# Altium PCB FinalPCB.PcbDoc
Units mil, origin at the board's own origin, x right, y up, seen from the top; angles counter-clockwise.
Board outline 3575 x 2485 mil, 2 copper layers (Top Layer, Bottom Layer); 63 components, 34 nets, 258 pads, 2 vias.
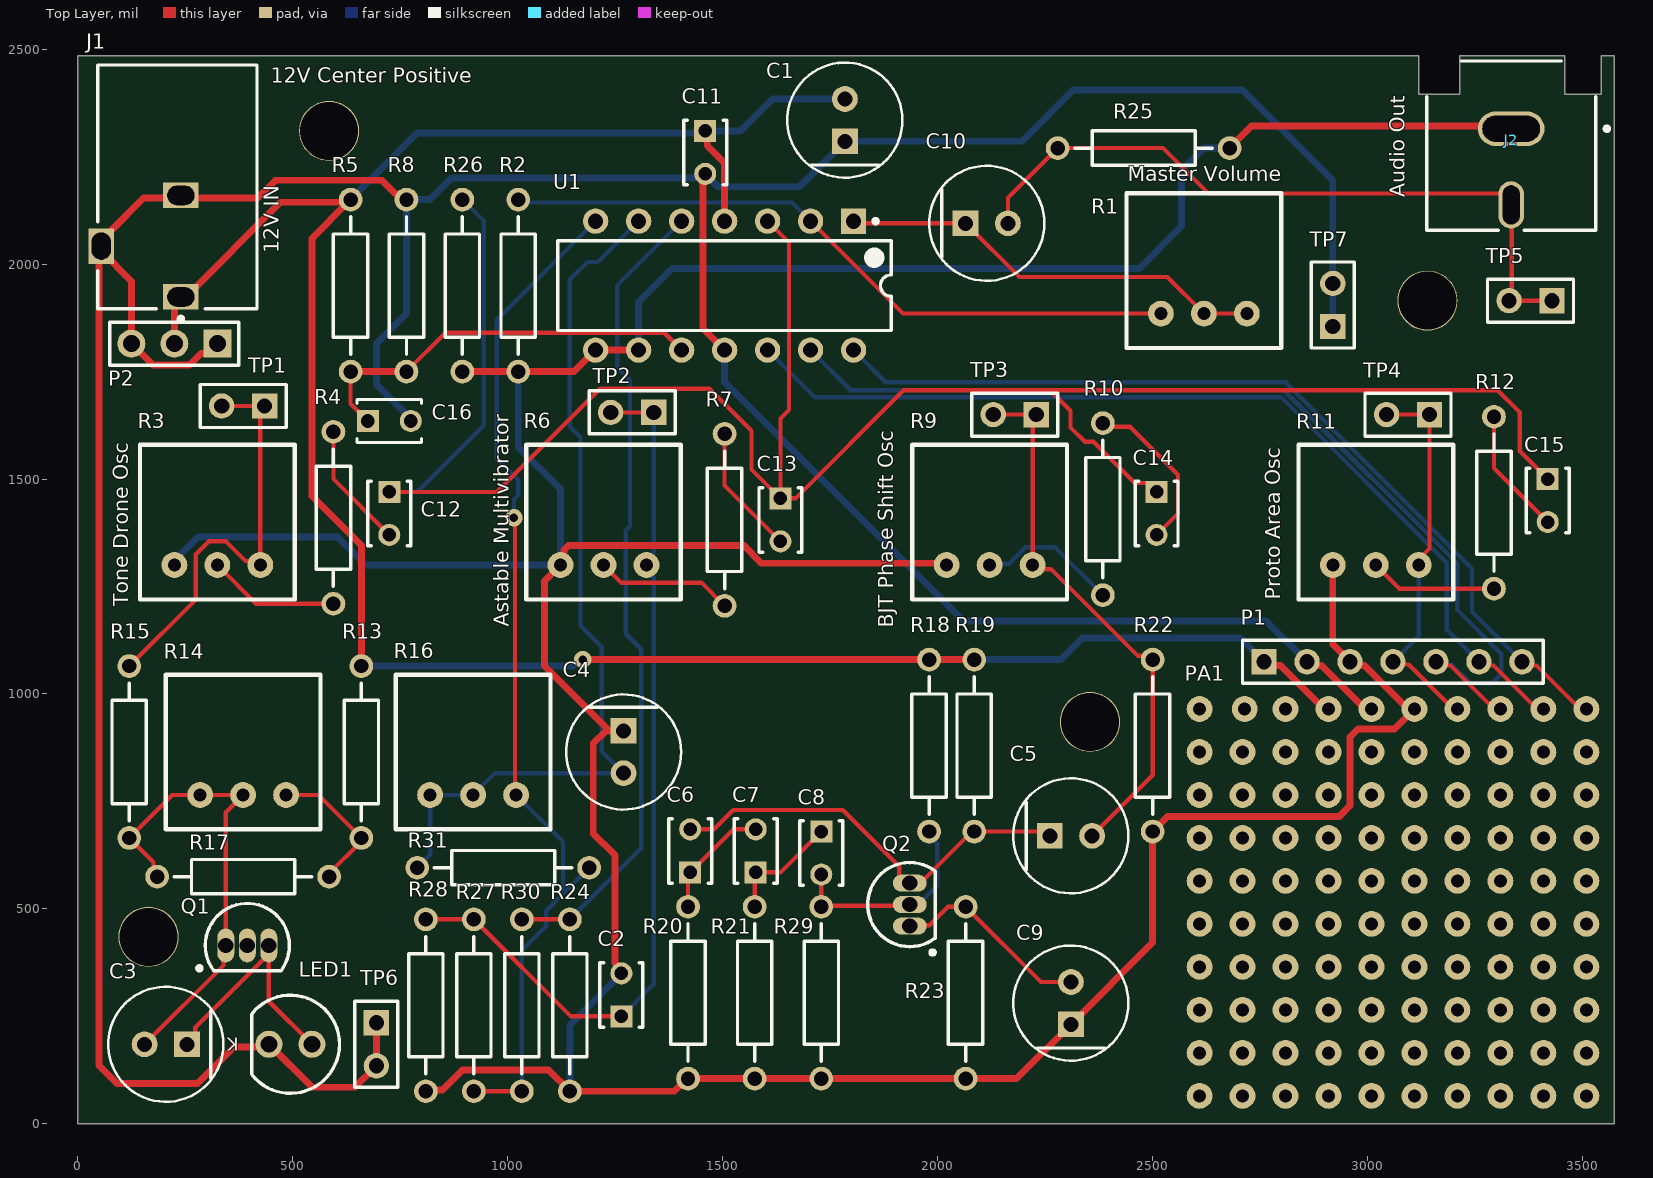
[diagram p0: Top Layer view]
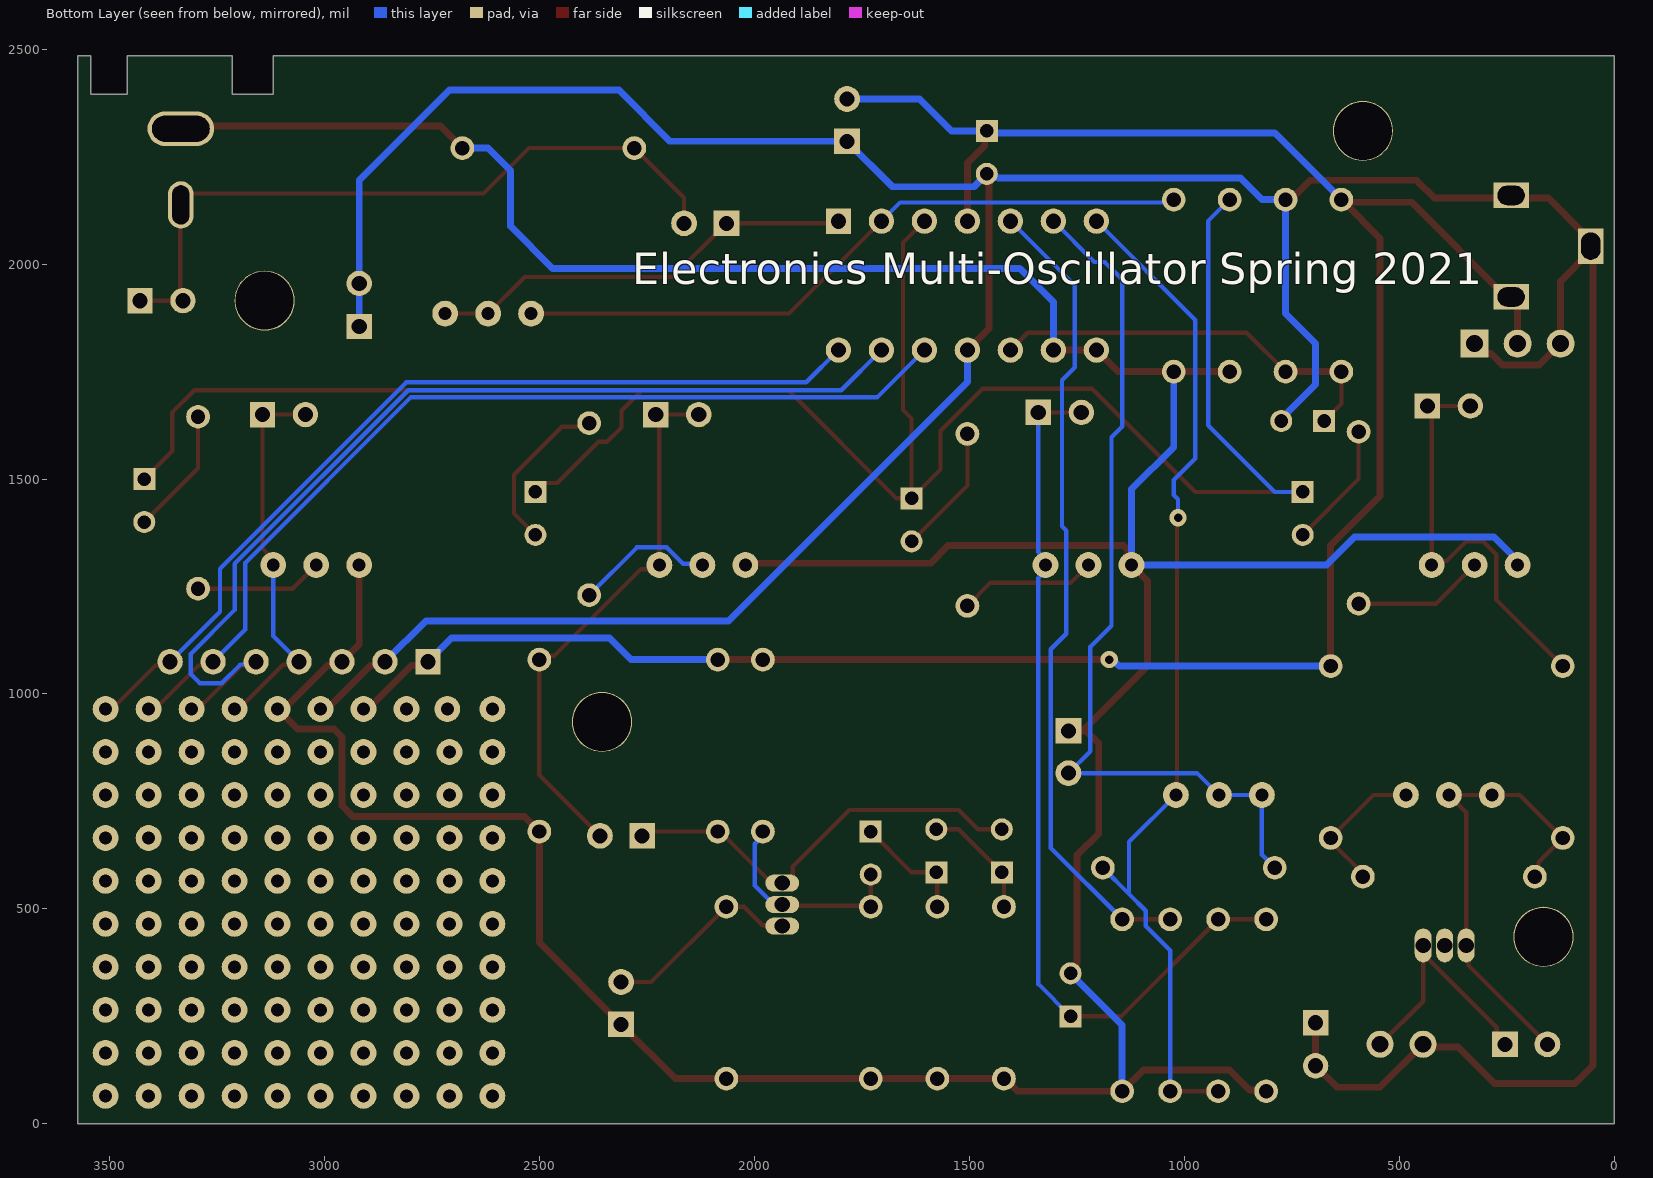
[diagram p1: Bottom Layer view, seen from below]

## Layer stack, top to bottom
Top Solder: solder mask 0.4, Solder Resist, Dk 3.5
Top Layer: signal copper 1.4
Dielectric 1: dielectric 12.6, FR-4, Dk 4.8
Bottom Layer: signal copper 1.4
Bottom Solder: solder mask 0.4, Solder Resist, Dk 3.5

## Board outline
0,0 0,2485 3120,2485 3120,2395 3215,2395 3215,2485 3460,2485 3460,2395 3545,2395 3545,2485 3575,2485 3575,0

## Design rules (kind name [scope] priority, off if disabled: settings)
Clearance [All] p1: gap=6 ignorepadtopadclearanceinfootprint=FALSE
PolygonConnect [All] p1: connectstyle=Relief reliefconductorwidth=10 reliefentries=4 polygonreliefangle="90 Angle" airgapwidth=10
RoomDefinition ToneDroneOsc [InComponentClass('ToneDroneOsc')] p1: confinementstyle=ConfineIn formatcopy=TRUE lockcomponents=FALSE outline -25,-5 780,-5 780,1125 -25,1125
RoomDefinition PerfBoard [InComponentClass('PerfBoard')] p2: confinementstyle=ConfineIn formatcopy=TRUE lockcomponents=FALSE outline 2570,25 3555,25 3555,1140 2570,1140
RoomDefinition OscMotherboard [InComponentClass('OscMotherboard')] p3: selectionmemoryflags=128 confinementstyle=ConfineIn formatcopy=TRUE lockcomponents=FALSE outline -110,45 3575,45 3575,2855 -110,2855
RoomDefinition BjtPhaseShiftOsc [InComponentClass('BjtPhaseShiftOsc')] p4: confinementstyle=ConfineIn formatcopy=TRUE lockcomponents=FALSE outline 1355.79,25 2562.5,25 2562.5,1120 1355.79,1120
RoomDefinition AstableMultivibrator [InComponentClass('AstableMultivibrator')] p5: confinementstyle=ConfineIn formatcopy=TRUE lockcomponents=FALSE outline 715,-4.21 1430,-4.21 1430,1105 715,1105
RoutingVias [All] p1: holewidth=20 width=40 viastyle="Through Hole" minholewidth=12 minwidth=40 maxholewidth=28 maxwidth=50
SolderMaskExpansion [All] p1: expansion=4 istentingtop=FALSE
Width "Power Nets" [(InNet('COM') OR InNet('VCC') OR InNet('GND'))] p1: maxlimit=20 minlimit=16 preferedwidth=16 minimp=50.000000 maximp=50.000000 favimp=50.000000
Width [All] p2: maxlimit=20 minlimit=6 preferedwidth=10 minimp=50.000000 maximp=50.000000 favimp=50.000000
30 further rules are at their usual default settings.

## Classes and differential pairs
component class ToneDroneOsc: C3 LED1 Q1 R13 R14 R15 R17
component class PerfBoard: P1 PA1
component class OscMotherboard: C1 C10 C11 C12 C13 C14 C15 C16 J1 J2 P2 R1 R2 R3 R4 R5 R6 R7 R8 R9 R10 R11 R12 R25 R26 TP1 TP2 TP3 TP4 TP5 TP6 U1
component class BjtPhaseShiftOsc: C5 C6 C7 C8 C9 Q2 R18 R19 R20 R21 R22 R23 R29
component class AstableMultivibrator: C2 C4 R16 R24 R27 R28 R30 R31

## Components (designator, comment, footprint, x,y, rotation, side; value= is the part's Value field where it differs from the comment)
C1 "10uF" FP-ESLE3-MFG 1785,2335 r90 top
C2 "0.01uF" KEMT-C315-THT-2 1265,300 r90 top
C3 "10uF" FP-ESLE3-MFG 205,185 r180 top
C4 "1uF" FP-ESLE3-MFG 1270,865 r270 top value=10uF
C5 "1uF" FP-ESLE3-MFG 2310.79,670 r0 top value=10uF
C6 "0.1uF" KEMT-C315-THT-2 1425,635 r90 top
C7 "0.1uF" KEMT-C315-THT-2 1577.5,635 r90 top
C8 "0.1uF" KEMT-C315-THT-2 1730,630 r270 top
C9 "47uF" FP-ESLE3-MFG 2310.79,280.79 r90 top value=10uF
C10 "1uF" FP-ESLE3-MFG 2115,2095 r0 top value=10uF
C11 "0.01uF" KEMT-C315-THT-2 1460,2260 r270 top
C12 "0.1uF" KEMT-C315-THT-2 725,1420 r270 top
C13 "0.1uF" KEMT-C315-THT-2 1635,1405 r270 top
C14 "0.01uF" KEMT-C315-THT-2 2510,1420 r270 top
C15 "0.1uF" KEMT-C315-THT-2 3420,1450 r270 top
C16 "0.1uF" KEMT-C315-THT-2 725,1635 r0 top
J1 "PJ-102B" CUI-PJ-102B_V 240,2041.89 r90 top
J2 "RCA Conn" CUI-RCJ-041_V 3335,2315 r180 top
LED1 "5mm Red" "Type 5mm" 495,185.1 r180 top
P1 "OSC4 Connector" HDR1X7 2760,1075 r0 top
P2 "Alternate Power" HDR1X3 325,1815 r180 top
PA1 "ProtoArea" ProtoArea 2610,965 r0 top
Q1 "2N3904" TO-92A 394.76,415 r270 top
Q2 "2N3904" TO-92A 1935.79,510 r0 top
R1 "50K" TrimmerPot 2520,1885 r0 top
R2 "10K" AXIAL-0.4 1025,1950 r270 top value=1K
R3 "50K" TrimmerPot 225,1300 r0 top
R4 "100K" AXIAL-0.4 595,1410 r270 top value=1K
R5 "10K" AXIAL-0.4 635,1950 r270 top value=1K
R6 "50K" TrimmerPot 1123.33,1300 r0 top
R7 "100K" AXIAL-0.4 1505,1405 r270 top value=1K
R8 "10K" AXIAL-0.4 765,1950 r90 top value=1K
R9 "50K" TrimmerPot 2021.67,1300 r0 top
R10 "100K" AXIAL-0.4 2385,1430 r270 top value=1K
R11 "50K" TrimmerPot 2920,1300 r0 top
R12 "100K" AXIAL-0.4 3295,1445 r270 top value=1K
R13 "1K" AXIAL-0.4 660,865 r90 top
R14 "50K" TrimmerPot 285,765 r0 top
R15 "100K" AXIAL-0.4 120,865 r270 top
R16 "50K" TrimmerPot 820,765 r0 top
R17 "3K" AXIAL-0.4 385,575 r0 top value=1K
R18 "64K" AXIAL-0.4 1980.79,880 r90 top
R19 "1K" AXIAL-0.4 2085.79,880 r270 top
R20 "10K" AXIAL-0.4 1420,305 r270 top
R21 "10K" AXIAL-0.4 1575,305 r270 top
R22 "1Meg" AXIAL-0.4 2500.79,880 r270 top
R23 "680" AXIAL-0.4 2065.79,305 r270 top
R24 "47K" AXIAL-0.4 1145,275.79 r90 top value=1K
R25 "47K" AXIAL-0.4 2480,2270 r0 top value=1K
R26 "1Meg" AXIAL-0.4 895,1950 r270 top value=1K
R27 "22K" AXIAL-0.4 921.67,275.79 r90 top value=1K
R28 "10K" AXIAL-0.4 810,275.79 r270 top value=1K
R29 "10K" AXIAL-0.4 1730,305 r270 top
R30 "47K" AXIAL-0.4 1033.33,275.79 r90 top value=1K
R31 "47K" AXIAL-0.4 990,595.79 r180 top value=1K
TP1 "Test Point" HDR1X2 435,1670 r180 top
TP2 "Test Point" HDR1X2 1340,1655 r180 top
TP3 "Test Point" HDR1X2 2230,1650 r180 top
TP4 "Test Point" HDR1X2 3145,1650 r180 top
TP5 "Test Point" HDR1X2 3430,1915 r180 top
TP6 "Test Point" HDR1X2 695,235 r270 top
TP7 "Test Point" HDR1X2 2920,1855 r90 top
U1 "LM324N" N0014A 1505,1950 r270 top

## Footprints (in the part's own frame and the unit in brackets; to place one, negate y for a bottom-side part, rotate by r counter-clockwise, add the part's x,y. Pads: shape width x height; smd on the part's side, far side on the other; paste and mask are expansions set on the pad)
AXIAL-0.4 [mm] "Axial Device, Thru-Hole; 2 Leads; 0.4 in Pin Spacing"
  round 1.4 hole 0.85: 1(-5.08,0) 2(5.08,0)
  silkscreen extent -4.06,-1.02 4.06,1.02
CUI-PJ-102B_V [mm] "THD, 3-Leads, Body 14.4x9mm, Height 11mm"
  rect 1.5x2.1 hole 1.143 slot 1.6 at 90 deg: 1(-3,0) 2(3,0)
  rect 2.1x1.5 hole 1.143 slot 1.6 at 0 deg: 3(0,4.7)
  silkscreen extent -4.42,-4.5 10.7,4.9, body extent -3.7,-4.5 10.7,4.9, height 11
CUI-RCJ-041_V [mm] "Jack, 2-Leads, Body 19.5x10mm"
  oval 3.937x2.032 hole 1.524 slot 3.4 at 0 deg: 1(0,0)
  oval 1.5x2.8 hole 1 slot 2.3 at 90 deg: 2(0,4.5)
  rect 0x0 hole 1.829 square unplated: MH1(-4.25,-3.15) MH2(4.25,-3.15)
  silkscreen extent -5.77,-4 5,6, body extent -5,-13.5 5,6, height 11.51
FP-ESLE3-MFG [mil]
  rect 60x60 hole 35 paste-39370.1 mask+0: 1(-49.21,0)
  round 60 hole 35 paste-39370.1 mask+0: 2(49.21,0)
  silkscreen extent -134,-134 134,134, body extent -138,-138 138,138, height 10
HDR1X2 [mm] "Connector; Header; 2 Position"
  rect 1.5x1.5 hole 0.9: 1(0,0)
  round 1.5 hole 0.9: 2(2.54,0)
  silkscreen extent -1.27,-1.27 3.81,1.27
HDR1X3 [mil] "Connector; Header; 3 Position"
  rect 65x65 hole 40: 1(0,0)
  round 65 hole 40: 2(100,0) 3(200,0)
  silkscreen extent -50,-50 250,50
HDR1X7 [mm] "Connector; Header; 7 Position"
  rect 1.5x1.5 hole 0.9: 1(0,0)
  round 1.5 hole 0.9: 2(2.54,0) 3(5.08,0) 4(7.62,0) 5(10.16,0) 6(12.7,0) 7(15.24,0)
  silkscreen extent -1.27,-1.27 16.51,1.27
KEMT-C315-THT-2 [mm] "THD, 2-Leads, Body 3.81x2.54mm"
  rect 1.3x1.3 hole 0.8: 1(-1.27,0)
  round 1.3 hole 0.8: 2(1.27,0)
  silkscreen extent -1.91,-1.27 1.91,1.27, body extent -1.91,-1.27 1.91,1.27, height 4.66
N0014A [mm] "DIP, 14-Leads, Body 19.7x6.6mm, Pitch 2.54mm"
  rect 1.5x1.5 hole 0.9: 1(-3.81,7.62)
  round 1.5 hole 0.9: 2(-3.81,5.08) 3(-3.81,2.54) 4(-3.81,0) 5(-3.81,-2.54) 6(-3.81,-5.08) 7(-3.81,-7.62) 8(3.81,-7.62) 9(3.81,-5.08) 10(3.81,-2.54) 11(3.81,0) 12(3.81,2.54) 13(3.81,5.08) 14(3.81,7.62)
  silkscreen extent -3.93,-9.85 2.65,9.85, body extent -3.95,-9.85 3.95,9.85, height 5.08
ProtoArea [mil]
  round 60 hole 30: 1(0,0) 2(105,0) 3(200,0) 4(300,0) 5(400,0) 6(500,0) 7(600,0) 8(700,0) 9(800,0) 10(900,0) 11(0,-100) 12(100,-100) 13(200,-100) 14(300,-100) 15(400,-100) 16(500,-100) 17(600,-100) 18(700,-100) 19(800,-100) 20(900,-100) 21(0,-200) 22(100,-200) 23(200,-200) 24(300,-200) 25(400,-200) 26(500,-200) 27(600,-200) 28(700,-200) 29(800,-200) 30(900,-200) 31(0,-300) 32(100,-300) 33(200,-300) 34(300,-300) 35(400,-300) 36(500,-300) 37(600,-300) 38(700,-300) 39(800,-300) 40(900,-300) 41(0,-400) 42(100,-400) 43(200,-400) 44(300,-400) 45(400,-400) 46(500,-400) 47(600,-400) 48(700,-400) 49(800,-400) 50(900,-400) 51(0,-500) 52(100,-500) 53(200,-500) 54(300,-500) 55(400,-500) 56(500,-500) 57(600,-500) 58(700,-500) 59(800,-500) 60(900,-500) 61(0,-600) 62(100,-600) 63(200,-600) 64(300,-600) 65(400,-600) 66(500,-600) 67(600,-600) 68(700,-600) 69(800,-600) 70(900,-600) 71(0,-700) 72(100,-700) 73(200,-700) 74(300,-700) 75(400,-700) 76(500,-700) 77(600,-700) 78(700,-700) 79(800,-700) 80(900,-700) 81(0,-800) 82(100,-800) 83(200,-800) 84(300,-800) 85(400,-800) 86(500,-800) 87(600,-800) 88(700,-800) 89(800,-800) 90(900,-800) 91(0,-900) 92(100,-900) 93(200,-900) 94(300,-900) 95(400,-900) 96(500,-900) 97(600,-900) 98(700,-900) 99(800,-900) 100(900,-900)
TO-92A [mm] "TO, Flat Index; 3 In-Line, Axial Leads; Body Dia. 4.5mm; Leads 0.51 x 0.48 mm (max)"
  oval 2x1 hole 0.9: 1(0,-1.27) 2(0,0) 3(0,1.27)
  silkscreen extent -2.48,-2.95 1.5,2.48, body extent -2.48,-2.5 1.5,2.5, height 6.86
TrimmerPot [mil]
  round 60 hole 30: 1(0,0) 2(100,0) 3(200,0)
  silkscreen extent -80,-80 280,280
"Type 5mm" [mm] "THT, LED-5mm, 2pin- Body 5.8mm"
  round 1.6 hole 1: 1(1.27,0) 2(-1.27,0)
  silkscreen extent -2.9,-2.9 2.29,2.9, body extent -2.9,-2.9 2.5,2.9, height 11.7

## Part data
C1 C3: library part CMP-03015-000004-1, "CAP ALUM 10UF 20% 100V THRU HOLE", Leakage Current=10uA, Manufacturer=kemet, Manufacturer Part Number=ESL106M100AE3AA, Package=ESLE3, Ripple Current=280mA, Temperature="-40°C to +105°C", Temperature Range High=+105°C, Temperature Range Low=-40°C, Tolerance=20%, Voltage Rating=100V, Automotive=No, Capacitance=10uF, Category=Cap, ComponentLink2Description=Datasheet, ComponentLink2URL=https://content.kemet.com/datasheets/KEM_A4074_ESL.pdf, Device Class L1="Passive Components", Device Class L2=Capacitors, Device Class L3="Aluminum Electrolytic Capacitors", Digikey Description="CAP ALUM 10UF 20% 100V THRU HOLE", Dissipation Factor=9%, Esr=0.68Ω, Height=12.5mm, Lead Free=Yes, Life=10000Hours, Material=Aluminum, Mouser Description="Cap, 10UF, 100V, Alu Elec, Radial", Octopart=https://octopart.com/esl106m100ae3aa-kemet-84758885, RoHS=TRUE
C2 C6 C7 C8 C11 C12 C13 C14 C15 C16: library part CMP-1664-00007-1, "Capacitor, Ceramic, 0.01 uF, +/- 10%, 100 V, X7R, -55 to 125 degC, 2-Pin THD, RoHS, Bulk", Case\Package=PDIP, Forward Current="60 mA", Forward Voltage="1.5 V", Max Operating Temperature="100 degC", Max Power Dissipation="400 mW", Min Operating Temperature="-55 degC", Output Voltage="70 V", Package Quantity=2000, Channels=2, ComponentLink1Description="Manufacturer URL", ComponentLink1URL=http://www.kemet.com/, ComponentLink2Description=Datasheet, ComponentLink2URL=http://capacitoredge.kemet.com/capedge2/DataSheet/Datasheet-C315C103K1R5TA.pdf?pn=C315C103K1R5TA{BULK}, DatasheetVersion=Aug-16, Mount="Through Hole", Nominal Vf="1.3 V", PackageDescription="2-Pin Through Hole Device, Body 3.81 x 2.54 mm", PackageReference=C315-THT-2, Packaging=Rail/Tube, Pins=16, Radiation Hardening=No, REACH SVHC=Unknown, RoHSCompliant=true, Vce Max="500 mV"
C4 C5 C9 C10: library part CMP-03015-000004-1, "CAP ALUM 10UF 20% 100V THRU HOLE", Capacitance=10uF, Leakage Current=10uA, Manufacturer=kemet, Manufacturer Part Number=ESL106M100AE3AA, Package=ESLE3, Ripple Current=280mA, Temperature="-40°C to +105°C", Temperature Range High=+105°C, Temperature Range Low=-40°C, Tolerance=20%, Voltage Rating=100V, Automotive=No, Category=Cap, ComponentLink2Description=Datasheet, ComponentLink2URL=https://content.kemet.com/datasheets/KEM_A4074_ESL.pdf, Device Class L1="Passive Components", Device Class L2=Capacitors, Device Class L3="Aluminum Electrolytic Capacitors", Digikey Description="CAP ALUM 10UF 20% 100V THRU HOLE", Dissipation Factor=9%, Esr=0.68Ω, Height=12.5mm, Lead Free=Yes, Life=10000Hours, Material=Aluminum, Mouser Description="Cap, 10UF, 100V, Alu Elec, Radial", Octopart=https://octopart.com/esl106m100ae3aa-kemet-84758885, RoHS=TRUE
J1: library part CMP-2000-06900-1, "Through Hole Right Angle DC Power Jack, 2.5 A, 2.5 mm Center Pin, 3 Position, -25 to 85 degC, RoHS, Bulk", Current Rating=2.5A, Flammability Rating=UL94V-0, Insulation Resistance=100MOhms, Manufacturer=CUIInc., Operating Temperature Range=-25Cto+85C, Package Description="3-Pin Through Hole Device, Body 14.4 x 9 mm, Height 11 mm", Voltage Rating=24V, Brand=CUI, Connector Type=DCPowerJack, Contact Gender=Male, Contact Material=Copper, Contact Plating=Nickel, Datasheet URL=http://www.cui.com/product/resource/pj-102b.pdf, Datasheet Version="Rev. 1.03, 04/2016", Factory Pack Quantity=280, Housing Material=PolybutyleneTerephthalate(PBT), Inside Contact Diameter=2.5mm, Manufacturer URL=http://www.cui.com/, Mounting Angle=Right, Mounting Style=ThroughHole, Mounting Technology=ThroughHole, Outside Contact Diameter=6.5mm, Package Reference=PJ-102B, Packaging=Bulk, Product=Jacks, Product Category=DCPowerConnectors, RoHS=True, Termination Style=ThroughHole
J2: library part CMP-1692-00002-1, "Female RCJ Jack, 2 Position, Height 11.724 mm, Tail Length 4 mm, RoHS, Bulk", Case\Package=Metal, Colour=Black, Current Rating="500 mA", Max Operating Temperature="85 degC", Min Operating Temperature="-55 degC", Package Quantity=400, Voltage Rating="40 V", ComponentLink1Description="Manufacturer URL", ComponentLink1URL=http://www.cui.com/, ComponentLink2Description=Datasheet, ComponentLink2URL=http://www.cui.com/product/resource/rcj-04x.pdf, Connector Type=HDMI, Contact Material=Copper, Contact Plating=Gold, DatasheetVersion="Rev. B, 02/2012", Gender=Female, Height="6.1 mm", Lead Pitch="0.5 mm", Length="16.2 mm", Mount="Surface Mount", PackageDescription="Female RCJ Jack, 2 Position, Height 11.724 mm, Tail Length 4 mm", PackageReference=RCJ-041, Packaging="Tape and Reel", Pins=19, REACH SVHC="No SVHC", RoHSCompliant=true
LED1: library part CMP-1488-00008-1, "THT LED round mono-color color lens, WL-TMRW, Red", Emitting color=Red, Manufacturer="Wuerth Elektronik", PartNumber=151051RS11000, ComponentLink1Description="Manufacturer URL", ComponentLink1URL=http://www.we-online.com, ComponentLink2Description=Datasheet, ComponentLink2URL=http://katalog.we-online.de/pbs/datasheet/7448042001.pdfhttp://katalog.we-online.de/pbs/datasheet/7448042001.pdfhttp://katalog.we-online.de/pbs/datasheet/7448042001.pdfhttp://katalog.we-online.de/pbs/datasheet/151051RS11000.pdf, PackageReference="Type 5mm"
P1: library part "Header 7", "Header, 7-Pin", LatestRevisionDate=17-Jul-2002, LatestRevisionNote="Re-released for DXP Platform.", Publisher="Altium Limited"
P2: library part "Header 3", "Header, 3-Pin", LatestRevisionDate=17-Jul-2002, LatestRevisionNote="Re-released for DXP Platform.", Publisher="Altium Limited"
PA1: library part PerfBoard
Q1 Q2: "NPN General Purpose Amplifier", ComponentLink1Description="Manufacturer Link", ComponentLink1URL=http://www.fairchildsemi.com/, ComponentLink2Description=Datasheet, ComponentLink2URL=http://www.fairchildsemi.com/ds/2N%2F2N3904.pdf, DatasheetVersion=1997, LatestRevisionDate=15-Jan-2003, LatestRevisionNote="PCB Footprint 'BCY-W3/D4.7' replaced", PackageDescription="TO, Flat Index; 3 In-Line, Axial Leads; Body Dia. 4.5mm; Leads 0.51 x 0.48 mm (max)", PackageReference=TO-92A, PackageVersion=Sep-1998, Published=8-Jun-2000, Publisher="Altium Limited"
R1 R3 R6 R9 R11 R14 R16: library part TrimmerPot
R2 R4 R5 R7 R8 R10 R12 R13 R15 R17 R18 R19 R20 R21 R22 R23 R24 R25 R26 R27 R28 R29 R30 R31: library part Res2, "Resistor", LatestRevisionDate=17-Jul-2002, LatestRevisionNote="Re-released for DXP Platform.", PackageDescription="Axial Device, Thru-Hole; 2 Leads; 0.4 in Pin Spacing", PackageReference=AXIAL-0.4, Published=8-Jun-2000, Publisher="Altium Limited"
TP1 TP2 TP3 TP4 TP5 TP6 TP7: library part "Header 2", "Header, 2-Pin", LatestRevisionDate=17-Jul-2002, LatestRevisionNote="Re-released for DXP Platform.", Publisher="Altium Limited"
U1: library part CMP-0055-00082-3, "Low Power Quad Operational Amplifier, 14-pin MDIP", Manufacturer="Texas Instruments", Package Reference=N0014A, PackageTopMarking=NSUZXYYTTE#*LM324N, PowerWise=N, Code_JEDEC=MS-001-AA, ComponentLink1Description="Datasheet URL", ComponentLink1URL=http://www.ti.com/general/docs/lit/getliterature.tsp?genericPartNumber=LM324&fileType=pdf, CompType=Amplifiers, PackageDescription="MDIP, .750 x .250 x.130in, 14 Lead, .100in Pitch", PinCount=14, RoHS=N

## Free pads (board coordinates)
  round 140 hole 135: 101(165,435) 101(585,2310) 101(2355,935) 101(3140,1915)

## Via types
v1: diameter 40, hole 20, Top Layer to Bottom Layer, 2 vias

## Nets (pads, with @x,y where several pads share a name; then routed paths per layer and width w, separated by ;. In a path a pad name is that pad's centre, name@x,y a point inside that pad or via, vN(x,y) a via of type N, cw(c..) or ccw(c..) an arc to the next point about the centre after c; other vN are vias at no path point)
COM: C2.2 C4.1 C9.1 J2.1 P1.3 PA1.6 R2.2 R3.1 R6.1 R9.1 R11.1 R20.2 R21.2 R22.2 R23.2 R24.1 R25.2 R26.2 R28.2 R29.2 U1.8 U1.9 | length 10049
  Top Layer w16: R28.2 812.56,78.35 848.35,78.35 895,125 1095.79,125 R24.1 1389.02,75.79 1418.24,105 R20.2 R21.2 R29.2 R23.2 2184.21,105 C9.1 2500.79,421.57 R22.2 2535.79,715 2935,715 2960,740 2960,900 2978.71,918.71 3063.71,918.71 PA1.6 3100.43,974.57 3085.43,974.57 2993.99,1066.01 2968.99,1066.01 P1.3 2920,1115 R11.1 ; R26.2 R2.2 1155,1750 U1.8 U1.9 ; 1237.06,914.21 1086.39,1064.88 1086.39,1263.06 1131.75,1308.42 1131.75,1335.31 1141.45,1345 1549.8,1345 1590.8,1304 2017.67,1304 R9.1 ; C2.2 1265,359.52 1250,374.52 1250,625 1199.42,675.58 1199.42,884.57 1229.06,914.21 C4.1 ; R25.2 2730.98,2320.98 J2.1@3342.32,2320.98
  Bottom Layer w16: R3.1 225,1310 280,1365 605,1365 670,1300 R6.1 1123.33,1476.49 1025,1574.83 R2.2 ; R24.1 1145,230 C2.2 ; U1.9 1305,1911.83 1383.17,1990 2470,1990 2568.17,2088.17 2568.17,2218.17 2620,2270 R25.2
FinalOutput: C10.2 J2.2 R25.1 TP5.1 TP5.2 | length 1671.5
  Top Layer w10: C10.2 2164.21,2154.21 R25.1 2525,2270 2630.59,2164.41 3321.73,2164.41 3342.32,2143.82 3336.16,2137.66 3336.16,1921.16 TP5.2 TP5.1
GND: C1.1 C11.2 C16.2 J1.2 J1.3 LED1.1 P1.2 P2.1 P2.3 PA1.5 R8.2 TP6.1 TP6.2 TP7.1 TP7.2 U1.11 | length 9669
  Top Layer w16: J1.3@49.46,2030.08 49.46,135.54 91.31,93.69 278.69,93.69 363.79,178.79 438.69,178.79 LED1.1 545,85.1 645.1,85.1 TP6.2 TP6.1 ; P2.1 302.37,1792.37 287.37,1792.37 260,1765 175,1765 P2.3 125,1960.04 54.96,2030.08 J1.3 76.49,2063.42 76.49,2076.49 153.69,2153.69 233.69,2153.69 J1.2 246.31,2153.69 418.69,2153.69 460,2195 708.19,2195 738.64,2164.55 739.86,2164.55 754.41,2150 R8.2 ; C11.2 1455,2205 1455,1850 U1.11 ; P1.2 2868.99,1066.01 2893.99,1066.01 2985.43,974.57 3000.43,974.57 PA1.5
  Bottom Layer w16: C16.2 775,1640 695,1720 695,1815 765,1885 R8.2 820,2150 870,2200 1403.86,2200 1433.55,2200 1435.67,2202.12 1453.05,2202.12 C11.2@1455.17,2200 ; C11.2 1490,2180 1679.21,2180 C1.1 2196.71,2285.79 2315.93,2405 2710,2405 2920,2195 TP7.2 TP7.1 ; U1.11 1505,1726.16 2061.16,1170 2765,1170 P1.2
NetC3_1: C3.1 LED1.2 Q1.3 | length 560.7
  Top Layer w10: C3.1 273.59,204.38 273.59,224.14 Q1.3@444.76,395.32 ; Q1.3 Q1.3@444.76,395.32 ; LED1.2 444.76,285.34 Q1.3@444.76,395.32
NetC3_2: C3.2 Q1.1 R14.1 R14.2 R15.2 R17.1 | length 1098.3
  Top Layer w10: C3.2 339.14,368.36 339.14,409.38 Q1.1 344.76,724.76 R14.2 R14.1 220,765 R15.2 176.37,608.63 176.37,583.63 R17.1
NetC4_2: C4.2 R16.1 R16.2 R31.2 U1.6 | length 2069.1
  Bottom Layer w10: R31.2 790,595.98 820,625.98 R16.1 R16.2 970.79,815.79 C4.2 1219,866.79 1219,1109.81 1170,1158.81 1170,1597.17 1145,1622.17 1145,1964.14 1185.86,2005 1210,2005 U1.6
NetC5_1: C5.1 C6.2 Q2.3 R19.2 | length 994.1
  Top Layer w10: C6.2 1480,685 1525,730 1780,730 1911.42,598.58 1911.42,573.57 1924.99,560 1960.63,560 2080.63,680 R19.2 2251.57,680 C5.1
NetC6_1: C6.1 C7.2 R20.1 | length 276
  Top Layer w10: R20.1 1420,580 C6.1 1525,685 C7.2
NetC7_1: C7.1 C8.1 R21.1 | length 272.9
  Top Layer w10: R21.1 1575,582.5 C7.1 1635,585 C8.1
NetC8_2: C8.2 Q2.2 R18.1 R29.1 | length 498.9
  Top Layer w10: C8.2 R29.1 1732.5,507.5 1933.29,507.5 Q2.2
  Bottom Layer w10: Q2.2 1955.47,510 2000,554.53 2000,651.58 1980.79,670.8 R18.1
NetC9_2: C9.2 Q2.1 R23.1 | length 466.1
  Top Layer w10: Q2.1 1938.05,462.26 1982.26,462.26 2025,505 R23.1 2240.79,330 C9.2
NetC10_1: C10.1 R1.2 R1.3 U1.1 | length 1004.1
  Top Layer w10: U1.1 1810,2095 C10.1 2190.79,1970 2535,1970 R1.2 R1.3
NetC12_1: C12.1 C13.1 C14.1 C15.1 R26.1 U1.3 | length 5067.7
  Top Layer w10: C12.1 975,1470 1215,1710 1470,1710 1567.69,1612.31 1567.69,1522.31 C13.1 ; U1.3 1655,2050 1655,1660.93 1635,1640.93 C13.1 ; C14.1 2489.43,1490.57 2459.43,1490.57 2363.33,1586.67 2343.33,1586.67 2310,1620 2310,1658.75 2262.18,1706.57 ; C15.1 3355.19,1564.81 3355.19,1654.81 3303.43,1706.57 2262.18,1706.57 ; C13.1 1670,1455 1921.57,1706.57 2262.18,1706.57
  Bottom Layer w10: C12.1 790,1470 945,1625 945,2100 R26.1
NetC12_2: C12.2 R4.1 | length 293.8
  Top Layer w10: R4.1 595,1500 C12.2
NetC13_2: C13.2 R7.1 | length 303.8
  Top Layer w10: R7.1 1505,1485 C13.2
NetC14_2: C14.2 R10.1 | length 385.4
  Top Layer w10: R10.1 2393.63,1621.37 2448.63,1621.37 2560,1510 2560,1420 C14.2
NetC15_2: C15.2 R12.1 | length 296.8
  Top Layer w10: R12.1 3295,1525 C15.2
NetC16_1: C16.1 R5.2 R8.1 U1.10 | length 955.9
  Top Layer w10: R5.2 635,1675 C16.1 ; R8.1 855.53,1840.53 1364.47,1840.53 U1.10
  Top Layer w16: R5.2 R8.1
NetP1_5: P1.5 PA1.8 U1.13 | length 2386.7
  Top Layer w10: P1.5 3168.99,1066.01 3193.99,1066.01 3285.43,974.57 3300.43,974.57 PA1.8
  Bottom Layer w10: U1.13 1798.47,1706.53 2806.1,1706.53 3209.8,1302.83 3209.8,1195.2 3312.07,1092.93 3312.07,1046.46 3290.61,1025 3240,1025 3196.49,1068.51 3166.49,1068.51 P1.5
NetP1_6: P1.6 PA1.9 U1.12 | length 2241.7
  Top Layer w10: P1.6 3268.99,1066.01 3293.99,1066.01 3385.43,974.57 3400.43,974.57 PA1.9
  Bottom Layer w10: U1.12 1714.47,1690.53 2799.47,1690.53 3185,1305 3185,1150 P1.6
NetP1_7: P1.7 PA1.10 U1.14 | length 2109.6
  Top Layer w10: P1.7 3368.99,1066.01 3393.99,1066.01 3485.43,974.57 3500.43,974.57 PA1.10
  Bottom Layer w10: U1.14 1880,1725 2810.25,1725 3243.8,1291.46 3243.8,1191.2 P1.7
NetR1_1: R1.1 R2.1 U1.2 | length 1604.8
  Top Layer w10: U1.2 1920,1885 R1.1
  Bottom Layer w10: R2.1 1031.59,2143.41 1661.59,2143.41 U1.2
NetR3_2: R3.2 R4.2 | length 307.3
  Top Layer w10: R3.2 415,1210 R4.2
NetR6_2: R6.2 R7.2 | length 321
  Top Layer w10: R6.2 1264.33,1259 1451,1259 R7.2
NetR9_2: R9.2 R10.2 | length 326.3
  Bottom Layer w10: R9.2 2124.65,1302.98 2166.67,1302.98 2204.68,1341 2274,1341 R10.2
NetR11_2: R11.2 R12.2 | length 297.8
  Top Layer w10: R11.2 3075,1245 R12.2
NetR13_1: R13.1 R14.3 R17.2 | length 337.5
  Top Layer w10: R14.3 560,765 R13.1 660,657.5 585,582.5 R17.2
NetR16_3: R16.3 R27.1 R30.1 R31.1 U1.7 | length 2441
  Top Layer w10: R27.1 R30.1 ; v1(1015,1410) 1017.5,1407.5 1017.5,767.5 R16.3 ; U1.7@1193.12,2100 U1.7
  Bottom Layer w10: v1(1015,1410) 1015,1452.94 1025,1462.94 1025,1497.77 975,1547.77 975,1870 U1.7 ; R16.3 1129,656 1129,534.79 ; R30.1 1033.33,403.33 1090,460 1090,495.79 1129,534.79 ; R31.1 1129,534.79
NetR24_2: R24.2 R30.2 U1.5 | length 1898.2
  Top Layer w10: R30.2 R24.2
  Bottom Layer w10: R24.2 1311,641.79 1311,1104 1275,1140 1275,1380 1285,1390 1285,1730 1255,1760 1255,1950 U1.5
OSC1: R3.3 R15.1 TP1.1 TP1.2 | length 983.6
  Top Layer w10: R15.1 275,1220 275,1325 305,1355 345,1355 390.43,1309.57 415.43,1309.57 R3.3 425,1660 TP1.1 TP1.2
OSC2: C2.1 R6.3 R27.2 R28.1 TP2.1 TP2.2 | length 2098.4
  Top Layer w10: R28.1 R27.2 1147.45,250 C2.1 ; TP2.2 TP2.1
  Bottom Layer w10: C2.1 1340,325 1340,1269.8 1323.33,1286.47 1323.33,1313.53 1340,1330.2 TP2.1
OSC3: C5.2 R9.3 R22.1 TP3.1 TP3.2 | length 1292
  Top Layer w10: TP3.2 TP3.1 2221.67,1641.67 R9.3 2231.23,1290.43 2264.76,1290.43 2466.56,1088.63 2492.16,1088.63 R22.1 2500.79,810.79 C5.2
OSC4: P1.4 PA1.7 R11.3 TP4.1 TP4.2 | length 905.8
  Top Layer w10: TP4.2 TP4.1 3145,1338.53 3120,1313.53 R11.3 ; P1.4 3066.49,1068.51 3096.49,1068.51 3200,965 PA1.7
  Bottom Layer w10: P1.4 3120,1135 R11.3
VCC: C1.2 C11.1 J1.1 P1.1 P2.2 PA1.4 R5.1 R13.2 R18.2 R19.1 U1.4 | length 5586
  Top Layer w16: P2.2 225,1908.78 J1.1 251.81,1923.78 472.03,2144 R5.1@629,2144 ; R5.1 R5.1@629,2144 ; R13.2 660,1345 545,1460 545,2060 R5.1@629,2144 ; v1(1175,1080) R18.2 R19.1 ; C11.1 1464.73,2305.27 1464.73,2275.27 1505,2235 U1.4 ; P1.1 2768.67,1066.33 2798.67,1066.33 2900,965 PA1.4
  Bottom Layer w16: R5.1 790,2305 1455,2305 C11.1 1542.37,2310 1616.58,2384.21 C1.2 ; R13.2 1151.88,1065 1166.88,1080 v1(1175,1080) ; R19.1 2288.1,1080 2338.1,1130 2705,1130 P1.1
pads on no net: J2.MH1 J2.MH2 PA1.1 PA1.2 PA1.3 PA1.11 PA1.12 PA1.13 PA1.14 PA1.15 PA1.16 PA1.17 PA1.18 PA1.19 PA1.20 PA1.21 PA1.22 PA1.23 PA1.24 PA1.25 PA1.26 PA1.27 PA1.28 PA1.29 PA1.30 PA1.31 PA1.32 PA1.33 PA1.34 PA1.35 PA1.36 PA1.37 PA1.38 PA1.39 PA1.40 PA1.41 PA1.42 PA1.43 PA1.44 PA1.45 PA1.46 PA1.47 PA1.48 PA1.49 PA1.50 PA1.51 PA1.52 PA1.53 PA1.54 PA1.55 PA1.56 PA1.57 PA1.58 PA1.59 PA1.60 PA1.61 PA1.62 PA1.63 PA1.64 PA1.65 PA1.66 PA1.67 PA1.68 PA1.69 PA1.70 PA1.71 PA1.72 PA1.73 PA1.74 PA1.75 PA1.76 PA1.77 PA1.78 PA1.79 PA1.80 PA1.81 PA1.82 PA1.83 PA1.84 PA1.85 PA1.86 PA1.87 PA1.88 PA1.89 PA1.90 PA1.91 PA1.92 PA1.93 PA1.94 PA1.95 PA1.96 PA1.97 PA1.98 PA1.99 PA1.100 Q1.2

## Silkscreen, mask and mechanical layers (free items; w line width, h text height)
Top Overlay:
  text "12V Center Positive" at 448.95,2410.67 h60
  text "Master Volume" at 2442.57,2180.61 h60
  text "Audio Out" at 3099.33,2155 h60 r90
  text "12V IN" at 480,2025 h60 r90
  text "Proto Area Osc" at 2809.33,1218.82 h60 r90
  text "Tone Drone Osc" at 129.33,1203.95 h60 r90
  text "Astable Multivibrator" at 1014.39,1156.38 h60 r90
  text "BJT Phase Shift Osc" at 1909.33,1154.52 h60 r90
Bottom Overlay:
  text "Electronics Multi-Oscillator Spring 2021" at 2285,1928.49 h125
Mechanical 1:
  the board outline again, w10

## Text inside footprints (layer, text, board x,y; h text height)
LED1: Top Overlay "K" at 375,200.1 h30 r180; Top Courtyard "K" at 375,200.1 h30 r180